# Altium PCB pre_adc_pcb.PcbDoc
Units mil, origin at the board's own origin, x right, y up, seen from the top; angles counter-clockwise.
Board outline 6000 x 4000 mil, 2 copper layers (Top Layer, Bottom Layer); 31 components, 24 nets, 103 pads, 10 vias.
Unrouted connection lines stored in the file: 67.
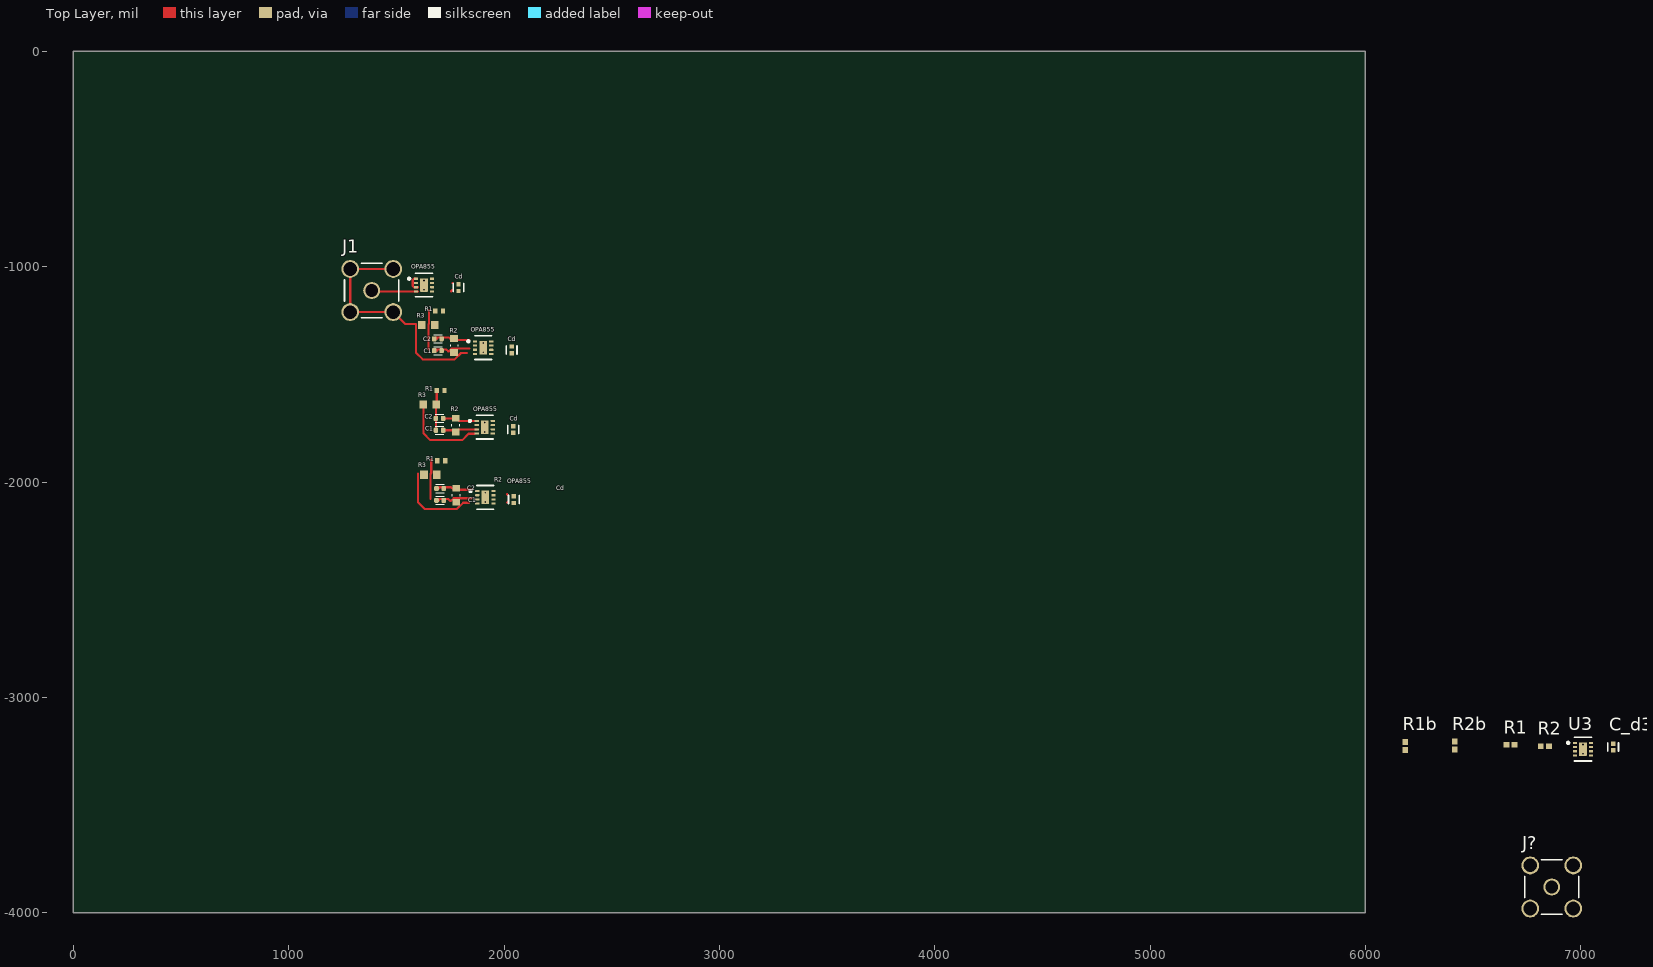
[diagram p0: Top Layer view]
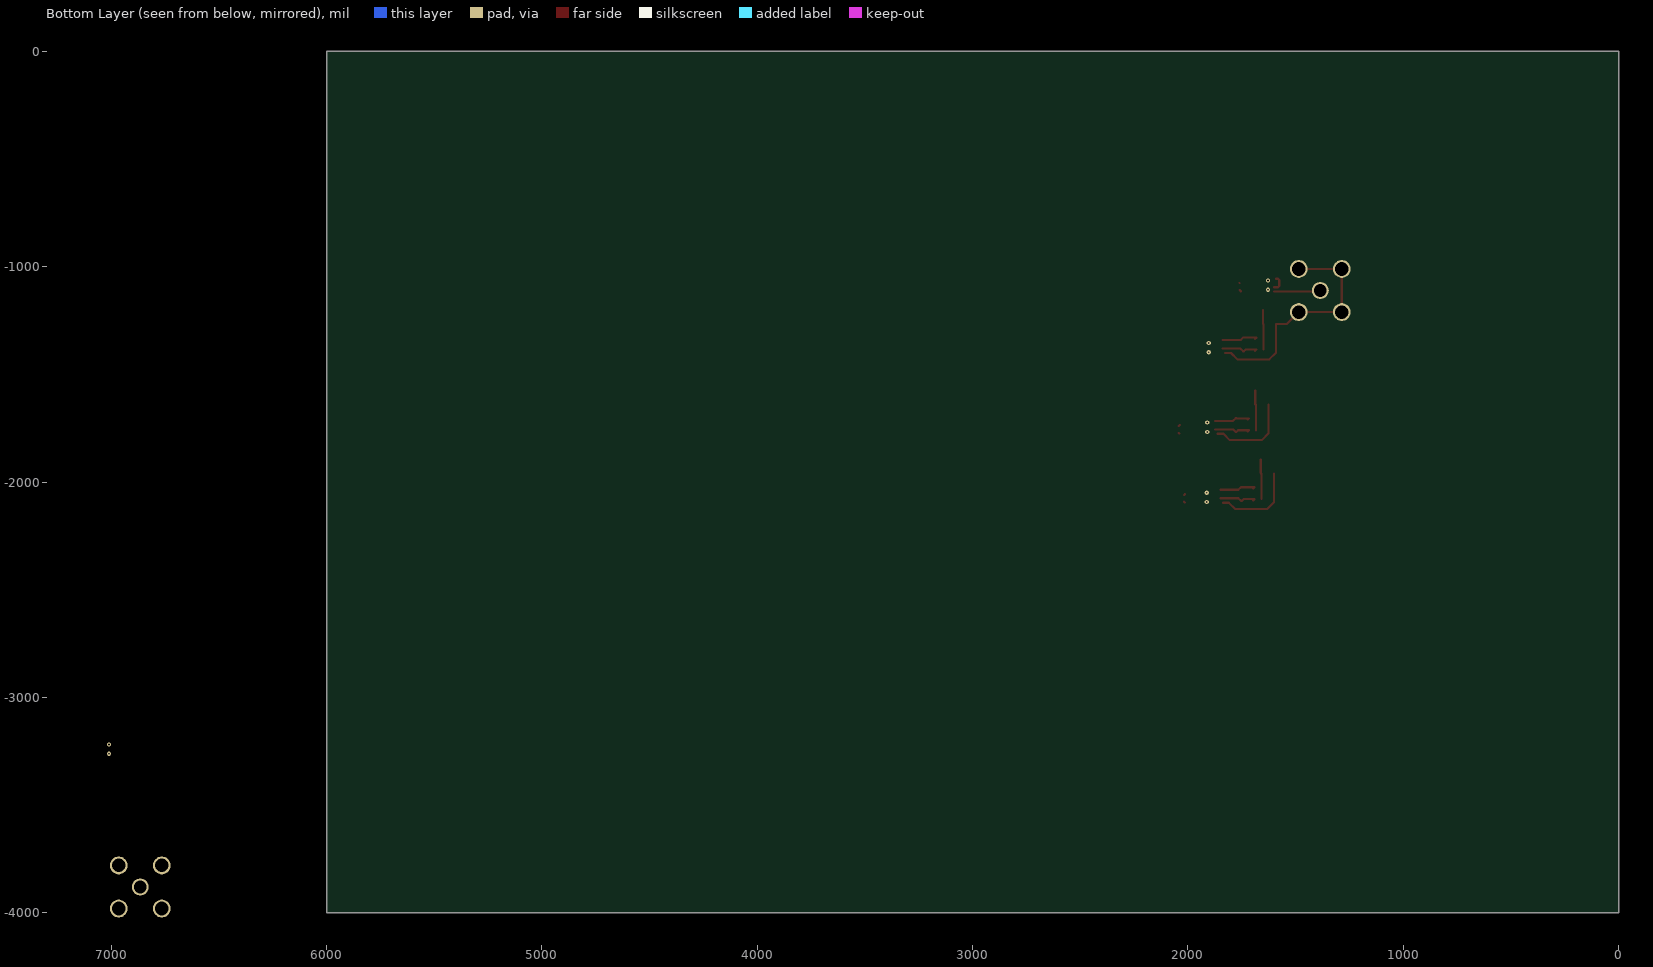
[diagram p1: Bottom Layer view, seen from below]

## Layer stack, top to bottom
Top Solder: solder mask 0.4, Solder Resist, Dk 3.5
Top Layer: signal copper 1.4
Dielectric 1: dielectric 12.6, FR-4, Dk 4.8
Bottom Layer: signal copper 1.4
Bottom Solder: solder mask 0.4, Solder Resist, Dk 3.5

## Board outline
0,-4000 6000,-4000 6000,0 0,0

## Design rules (kind name [scope] priority, off if disabled: settings)
Clearance [All] p1: gap=5 ignorepadtopadclearanceinfootprint=FALSE
HoleSize [All] p1: absolutevalues=TRUE maxlimit=100 minlimit=8 maxpercent=80.000 minpercent=20.000
PolygonConnect [All] p1: connectstyle=Relief reliefconductorwidth=10 reliefentries=4 polygonreliefangle="90 Angle" airgapwidth=10
RoomDefinition U_unity_amplifier [InComponentClass('U_unity_amplifier')] p1: confinementstyle=ConfineIn formatcopy=TRUE lockcomponents=TRUE outline 1550,-1150 1800,-1150 1800,-975 1550,-975
RoomDefinition U_delyiannis_filter3 [InComponentClass('U_delyiannis_filter3')] p2: confinementstyle=ConfineIn formatcopy=TRUE lockcomponents=FALSE outline 1550,-1450 2040,-1450 2040,-1175 1550,-1175
RoomDefinition U_delyiannis_filter2 [InComponentClass('U_delyiannis_filter2')] p3: confinementstyle=ConfineIn formatcopy=FALSE lockcomponents=FALSE outline 1585,-1825 2075,-1825 2075,-1550 1585,-1550
RoomDefinition U_delyiannis_filter1 [InComponentClass('U_delyiannis_filter1')] p4: confinementstyle=ConfineIn formatcopy=TRUE lockcomponents=FALSE outline 1560,-2145 2050,-2145 2050,-1870 1560,-1870
RoomDefinition U_level_shift [InComponentClass('U_level_shift')] p5: confinementstyle=ConfineIn formatcopy=TRUE lockcomponents=FALSE outline 6155,-3305 7370,-3305 7370,-3075 6155,-3075
RoutingVias [All] p1: holewidth=10 width=20 viastyle="Through Hole" minholewidth=8 minwidth=16 maxholewidth=25 maxwidth=50
SolderMaskExpansion [All] p1: expansion=3 istentingtop=FALSE
Width [All] p1: maxlimit=20 minlimit=5 preferedwidth=10
29 further rules are at their usual default settings.

## Classes and differential pairs
channel class delyiannis_filter: U_delyiannis_filter1 U_delyiannis_filter2 U_delyiannis_filter3
component class U_unity_amplifier: Cd_U_delyiannis_filter2 OPA855_U_delyiannis_filter1
component class U_level_shift: C_d3 R1_U_delyiannis_filter1 R1b R2_U_delyiannis_filter3 R2b U3
component class U_delyiannis_filter3: C1_U_delyiannis_filter3 C2_U_delyiannis_filter3 Cd_U_delyiannis_filter2 OPA855_U_delyiannis_filter1 R1_U_delyiannis_filter3 R2_U_delyiannis_filter3 R3_U_delyiannis_filter3
component class U_delyiannis_filter2: C1_U_delyiannis_filter2 C2_U_delyiannis_filter1 Cd_U_delyiannis_filter2 OPA855_U_delyiannis_filter2 R1_U_delyiannis_filter1 R2_U_delyiannis_filter2 R3_U_delyiannis_filter1
component class U_delyiannis_filter1: C1_U_delyiannis_filter2 C2_U_delyiannis_filter1 Cd_U_delyiannis_filter1 OPA855_U_delyiannis_filter1 R1_U_delyiannis_filter1 R2_U_delyiannis_filter1 R3_U_delyiannis_filter1
component class main: J1 J?

## Components (designator, comment, footprint, x,y, rotation, side; value= is the part's Value field where it differs from the comment)
C1 "CC0402BRNPO9BN8R2" CAPC1005X55N 1692.6,-1389.45 r180 top
C1 "CC0402BRNPO9BN8R2" CAPC1005X55N 1700,-1758.98 r180 top
C1 "CC0402BRNPO9BN8R2" CAPC1005X55N 1702.6,-2084.45 r180 top
C2 "CC0402BRNPO9BN8R2" CAPC1005X55N 1692.6,-1334.45 r180 top
C2 "CC0402BRNPO9BN8R2" CAPC1005X55N 1700,-1703.98 r180 top
C2 "CC0402BRNPO9BN8R2" CAPC1005X55N 1702.6,-2029.45 r180 top
C_d3 "C0402C104K4RACTU" FP-C0402-BB-MFG#1 7150,-3230 r90 top value="0.10 μF"
Cd "C0402C104K4RACTU" FP-C0402-BB-MFG#2 2035,-1385.94 r270 top value="0.10 μF" (schematic designator C_d2)
Cd "C0402C104K4RACTU" FP-C0402-BB-MFG#1 2042.4,-1755.47 r270 top value="0.10 μF" (schematic designator C_d2)
Cd "C0402C104K4RACTU" FP-C0402-BB-MFG#1 2045,-2080.94 r270 top value="0.10 μF" (schematic designator C_d2)
Cd "C0402C104K4RACTU" FP-C0402-BB-MFG#2 1788.07,-1096.69 r270 top value="0.10 μF" (schematic designator C_d1)
J1 "5-1814832-1" TECO-5-1814832-1_V 1385,-1110 r0 top
J? "5-1814832-1" TECO-5-1814832-1_V 6865,-3880 r0 top
OPA855 "OPA855IDSGT" FP-DSG0008A-MFG#1 1902.6,-1375.47 r0 top (schematic designator U2)
OPA855 "OPA855IDSGT" FP-DSG0008A-MFG#2 1910,-1745 r0 top (schematic designator U2)
OPA855 "OPA855IDSGT" FP-DSG0008A-MFG#2 1912.6,-2070.47 r0 top (schematic designator U2)
OPA855 "OPA855IDSGT" FP-DSG0008A-MFG#1 1627.87,-1084.76 r0 top (schematic designator U1)
R1 "RC0402FR-07100RL" RESC1005X40X25ML05T10 6673.86,-3220.47 r0 top
R1 "RN73H1ETTP26R4F50" RESC1005X40N 1697.6,-1205.47 r180 top
R1 "RN73H1ETTP26R4F50" RESC1005X40N 1705,-1575 r180 top
R1 "RN73H1ETTP26R4F50" RESC1005X40N 1707.6,-1900.47 r180 top
R1b "RC0402FR-07100RL" RESC1005X40X25ML05T10 6185,-3225 r90 top
R2 "RC0402FR-07100RL" RESC1005X40X25ML05T10 6832.56,-3225.47 r0 top
R2 "RC0603FR-0753R6L" RESC1608X55N 1767.6,-1365.47 r90 top
R2 "RC0603FR-0753R6L" RESC1608X55N 1775,-1735 r90 top
R2 "RC0603FR-0753R6L" RESC1608X55N 1777.6,-2060.47 r90 top
R2b "RC0402FR-07100RL" RESC1005X40X25ML05T10 6415,-3223.7 r90 top
R3 "RMCF0603FT634R" RESC1508X55N 1647.6,-1270.47 r0 top
R3 "RMCF0603FT634R" RESC1508X55N 1655,-1640 r0 top
R3 "RMCF0603FT634R" RESC1508X55N 1657.6,-1965.47 r0 top
U3 "OPA855IDSGT" FP-DSG0008A-MFG#2 7010,-3240 r0 top

## Footprints (in the part's own frame and the unit in brackets; to place one, negate y for a bottom-side part, rotate by r counter-clockwise, add the part's x,y. Pads: shape width x height; smd on the part's side, far side on the other; paste and mask are expansions set on the pad)
CAPC1005X55N [mm]
  rrect53% 0.54x0.6 smd: 1(-0.43,0) 2(0.43,0)
  silkscreen extent -0.5,-0.48 0.5,0.48
FP-C0402-BB-MFG#1 [mm]
  rect 0.52x0.52 smd paste+0 mask+0: 1(-0.4,0) 2(0.4,0)
  silkscreen extent -0.5,-0.64 0.5,0.64, body extent -0.8,-0.4 0.8,0.4, height 0.25
FP-C0402-BB-MFG#2 [mm]
  rect 0.52x0.52 smd paste+0: 1(-0.4,0) 2(0.4,0)
  silkscreen extent -0.5,-0.64 0.5,0.64, body extent -0.8,-0.4 0.8,0.4, height 0.25
FP-DSG0008A-MFG#1 [mm]
  rrect40% 0.5x0.25 smd paste+0: 1(-0.95,0.75) 2(-0.95,0.25) 3(-0.95,-0.25) 4(-0.95,-0.75) 5(0.95,-0.75) 6(0.95,-0.25) 7(0.95,0.25) 8(0.95,0.75)
  rrect11% 0.9x1.6 smd paste-1000 mask+0: 9(0,0)
  silkscreen extent -1.87,-1.39 1,1.4, body extent -1.3,-1.15 1.3,1.15, height 0.25
FP-DSG0008A-MFG#2 [mm]
  rrect40% 0.5x0.25 smd paste+0 mask+0: 1(-0.95,0.75) 2(-0.95,0.25) 3(-0.95,-0.25) 4(-0.95,-0.75) 5(0.95,-0.75) 6(0.95,-0.25) 7(0.95,0.25) 8(0.95,0.75)
  rrect11% 0.9x1.6 smd paste-1000 mask+0: 9(0,0)
  silkscreen extent -1.87,-1.39 1,1.4, body extent -1.3,-1.15 1.3,1.15, height 0.25
RESC1005X40N [mm]
  rect 0.51x0.6 smd: 1(-0.465,0) 2(0.465,0)
RESC1005X40X25ML05T10 [mm] "Chip Resistor, 2-Leads, Body 1.00x0.50mm, IPC Low Density"
  rect 0.7x0.65 smd: 1(-0.475,0) 2(0.475,0)
  body extent -0.53,-0.27 0.53,0.28, height 0.4
RESC1508X55N [mm]
  rect 0.9x0.97 smd: 1(-0.76,0) 2(0.76,0)
RESC1608X55N [mm]
  rect 0.79x0.93 smd: 1(-0.82,0) 2(0.82,0)
  silkscreen extent -0.11,-0.45 0.11,0.45
TECO-5-1814832-1_V [mm] "THD, 5-Leads, Body 6.4x6.4mm, Pitch 5.08mm"
  round 2 hole 1.5: 1(0,0)
  round 2.1 hole 1.6: 2(-2.54,2.54) 3(-2.54,-2.54) 4(2.54,-2.54) 5(2.54,2.54)
  silkscreen extent -3.2,-3.2 3.2,3.2, body extent -3.21,-3.21 3.19,3.19, height 9.5

## Part data
C1 C1 C1 C2 C2 C2: "KC 8,2pF 0402 0,10pF 50V NP0", Package=None, Availability=Unavailable, MP=CC0402BRNPO9BN8R2, Price=None
C_d3 Cd Cd Cd Cd: library part CMP-2008-02108-2, "CAP CER 0.1UF 16V X7R 0402", Capacitance="0.10 μF", Manufacturer=Kemet, Package=C0402-BB, Temperature="-55°C to +125°C", Temperature Characteristic=X7R, Temperature Coefficient=15%, Temperature Range High=+125°C, Temperature Range Low=-55°C, Tolerance=0.1, Voltage Rating="16 V", Automotive=No, Category=Cap, ComponentLink2Description=Datasheet, ComponentLink2URL=https://content.kemet.com/datasheets/KEM_C1002_X7R_SMD.pdf, Device Class L1="Passive Components", Device Class L2=Capacitors, Device Class L3="Ceramic Capacitors", Digikey Description="CAP CER 0.1UF 16V X7R 0402", Height=0.55mm, Ipc Land Pattern Name=CAPC10050X50, Lead Free=Yes, Manufacturer Part Number=C0402C104K4RACTU, Material=Ceramic, Mouser Description="Cap Ceramic 0.1uF 16V X7R 10% SMD 0402 125?C Paper T/R - Tape and Reel (Alt: C0402C104K4RAC TU)", Octopart=https://octopart.com/c0402c104k4ractu-kemet-94158, RoHS=TRUE
J1 J?: library part CMP-2000-05415-1, "SMA Connector, Pitch 5.08 mm, 1 Position, Height 9.5 mm, Tail Length 4 mm, -65 to 165 degC, RoHS, Bulk", Frequency Max=3GHz, Manufacturer="TE Connectivity", Package Description="SMA Connector, Pitch 5.08 mm, 1 Position, Height 9.5 mm, Tail Length 4 mm", Coaxial Cable Types=-, Coaxial Termination=Solder, Connector Body Style=StraightJack, Connector Mounting=PCBMount, Connector Type=SMACoaxial, Contact Material=BerylliumCopper, Contact Plating=GoldPlatedContacts, Datasheet URL=http://www.onlinecomponents.com/productFiles/mf-AMP/eng_cd_1814832_a.pdf, Datasheet Version="Rev. B1, 03/2011", Impedance=50ohm, Manufacturer URL=http://www.te.com/, Package Reference=5-1814832-1, Product Range=ZDCSeries, SVHC=NoSVHC(15-Jun-2015)
OPA855 OPA855 OPA855 OPA855 U3: library part CMP-04895-000435-1, "IC OPAMP GP 1 CIRCUIT 8WSON", RoHS Compliant=Yes
R1 R1b R2 R2b: library part CMP-2002-07344-1, Manufacturer="Yageo / Phycomp", Part Number=RC0402FR-07100RL
R1 R1 R1 R3 R3 R3: Package=None, Availability=Unavailable, Price=None
  R1 R1 R1: MP=RN73H1ETTP26R4F50
  R3 R3 R3: MP=RMCF0603FT634R
R2 R2 R2: "Res Thick Film 0603 53.6 Ohm 1% 0.1W(1/10W) ?100ppm/?C Molded SMD Paper T/R", Package=None, Availability=Unavailable, MP=RC0603FR-0753R6L, Price=None

## Via types
v1: diameter 19.68, hole 7.87, Top Layer to Bottom Layer, 10 vias

## Nets (pads, with @x,y where several pads share a name; then routed paths per layer and width w, separated by ;. In a path a pad name is that pad's centre, name@x,y a point inside that pad or via, vN(x,y) a via of type N, cw(c..) or ccw(c..) an arc to the next point about the centre after c; other vN are vias at no path point)
0.5V: R2.1@6813.86,-3225.47
+5V: C_d3.1 Cd.1 OPA855.7 U3.7 | length 13.4
  Top Layer w10: 1760.16,-1075.16 1760.47,-1075.47 ; 2012.83,-2055.16 2017.4,-2059.72 ; Cd.1@2037.83,-1735.16 Cd.1@2042.4,-1739.72
  other v1: 1910,-1766.65 1910,-1723.35
-5V: C_d3.2 Cd.2 OPA855.5 OPA855.9@1902.6,-1375.47 OPA855.9@1910,-1745 OPA855.9@1912.6,-2070.47 U3.5 U3.9 | length 20
  Top Layer w10: 1752.91,-1114.53 1760.47,-1106.97 ; 2014.09,-2094.53 2017.4,-2091.22 ; Cd.2@2039.09,-1774.53 Cd.2@2042.4,-1771.22
  other v1: 7010,-3261.65 7010,-3218.35 1902.6,-1397.13 1902.6,-1353.82 1627.87,-1106.42 1627.87,-1063.11
GND: J1.2 J1.3 J1.4 J1.5 J?.2 J?.3 J?.4 J?.5 OPA855.4@1865.2,-1405 OPA855.4@1872.6,-1774.53 OPA855.4@1875.2,-2100 R1b.1 R3.1 | length 1913.9
  Top Layer w10: J1.5 J1.2 J1.3 J1.4 1540.47,-1265.47 1589.61,-1265.47 ; 1590.08,-1265.47 1590.08,-1398.15 1621.93,-1430 1770,-1430 1799.53,-1400.47 1827.42,-1400.47 ; 1600.08,-1960.47 1600.08,-2093.15 1631.93,-2125 1780,-2125 1809.53,-2095.47 1837.42,-2095.47 ; R3.1@1625.08,-1640.47 1625.08,-1773.15 1656.93,-1805 1805,-1805 1834.53,-1775.47 1862.42,-1775.47
NetC1_U_delyiannis_filter1_1: C1.1@1719.53,-2084.45 OPA855.3@1875.2,-2080.31 R2.1@1777.6,-2092.76 | length 173.2
  Top Layer w10: 1697.51,-2085.24 1691.93,-2079.66 1691.93,-2078.98 1741.69,-2078.98 1750,-2087.28 1752.76,-2087.28 1765.2,-2074.84 1847.6,-2074.84 1847.36,-2075.08
NetC1_U_delyiannis_filter1_2: C1.2@1685.67,-2084.45 C2.2@1685.67,-2029.45 R1.2@1689.29,-1900.47 R3.2@1687.52,-1965.47 | length 185.5
  Top Layer w10: 1658.07,-2078.98 1658.07,-2023.98 1658.07,-1961.85 1659.92,-1960 1661.69,-1958.23 1661.69,-1895
NetC1_U_delyiannis_filter2_1: C1.1@1716.93,-1758.98 OPA855.3@1872.6,-1754.84 R2.1@1775,-1767.28 | length 173.2
  Top Layer w10: C1.1@1722.51,-1765.24 1716.93,-1759.66 1716.93,-1758.98 1766.69,-1758.98 1775,-1767.28 1777.76,-1767.28 1790.2,-1754.84 1872.6,-1754.84 OPA855.3@1872.36,-1755.08
NetC1_U_delyiannis_filter2_2: C1.2@1683.07,-1758.98 C2.2@1683.07,-1703.98 R1.2@1686.69,-1575 R3.2@1684.92,-1640 | length 185.5
  Top Layer w10: C1.2@1683.07,-1758.98 1683.07,-1703.98 1683.07,-1641.85 1684.92,-1640 1686.69,-1638.23 R1.2@1686.69,-1575
NetC1_U_delyiannis_filter3_1: C1.1@1709.53,-1389.45 OPA855.3@1865.2,-1385.31 R2.1@1767.6,-1397.76 | length 173.2
  Top Layer w10: 1687.51,-1390.24 1681.93,-1384.66 1681.93,-1383.98 1731.69,-1383.98 1740,-1392.28 1742.76,-1392.28 1755.2,-1379.84 1837.6,-1379.84 1837.36,-1380.08
NetC1_U_delyiannis_filter3_2: C1.2@1675.67,-1389.45 C2.2@1675.67,-1334.45 R1.2@1679.29,-1205.47 R3.2@1677.52,-1270.47 | length 185.5
  Top Layer w10: 1648.07,-1383.98 1648.07,-1328.98 1648.07,-1266.85 1649.92,-1265 1651.69,-1263.23 1651.69,-1200
NetC2_U_delyiannis_filter1_1: C2.1@1719.53,-2029.45 OPA855.1@1875.2,-2040.94 R2.2@1777.6,-2028.19 | length 169.5
  Top Layer w10: 1697.51,-2029.71 1691.93,-2024.13 1691.93,-2023.98 1748.74,-2023.98 1750,-2022.72 1752.76,-2022.72 1765.51,-2035.47 1847.6,-2035.47
NetC2_U_delyiannis_filter2_1: C2.1@1716.93,-1703.98 OPA855.1@1872.6,-1715.47 R2.2@1775,-1702.72 | length 169.5
  Top Layer w10: C2.1@1722.51,-1709.71 1716.93,-1704.13 1716.93,-1703.98 1773.74,-1703.98 1775,-1702.72 1777.76,-1702.72 1790.51,-1715.47 OPA855.1@1872.6,-1715.47
NetC2_U_delyiannis_filter3_1: C2.1@1709.53,-1334.45 OPA855.1@1865.2,-1345.94 R2.2@1767.6,-1333.19 | length 169.5
  Top Layer w10: 1687.51,-1334.71 1681.93,-1329.13 1681.93,-1328.98 1738.74,-1328.98 1740,-1327.72 1742.76,-1327.72 1755.51,-1340.47 1837.6,-1340.47
NetJ1_1: J1.1 OPA855.4@1590.47,-1114.29 | length 217.5
  Top Layer w10: J1.1 1390,-1115 1600.47,-1115
NetJ?_1: J?.1 U3.6
NetR1_1: OPA855.6@1950,-2080.31 R1.1@6655.16,-3220.47
NetR1_2: R1.2@6692.56,-3220.47 R2.2@6851.26,-3225.47 U3.4
NetR1_U_delyiannis_filter1_1: OPA855.6@1947.4,-1754.84 R1.1@1725.91,-1900.47
NetR1_U_delyiannis_filter2_1: OPA855.6@1940,-1385.31 R1.1@1723.31,-1575
NetR1_U_delyiannis_filter3_1: OPA855.6@1665.28,-1094.61 R1.1@1715.91,-1205.47
NetR1b_2: R1b.2 R2b.1 U3.3
NetR2b_2: R2b.2 U3.1
NetU1_1: OPA855.1@1590.47,-1055.24 OPA855.3@1590.47,-1094.61 | length 72.6
  Top Layer w10: OPA855.1@1590.47,-1055.24 1581.57,-1055.24 1575.47,-1061.33 1575.47,-1088.98 1581.33,-1094.84 1600.47,-1094.84
pwr_on: OPA855.8 U3.8
pads on no net: OPA855.2 OPA855.9@1627.87,-1084.76 U3.2
copper on no net:
  other v1: 1912.6,-2092.13 1912.6,-2048.82